# Altium PCB PCB1.PcbDoc
Units mil, origin at the board's own origin, x right, y up, seen from the top; angles counter-clockwise.
Board outline 1968.5 x 1968.5 mil, 2 copper layers (Top Layer, Bottom Layer), stack 65.792 mil thick; 11 components, 7 nets, 23 pads, 0 vias.
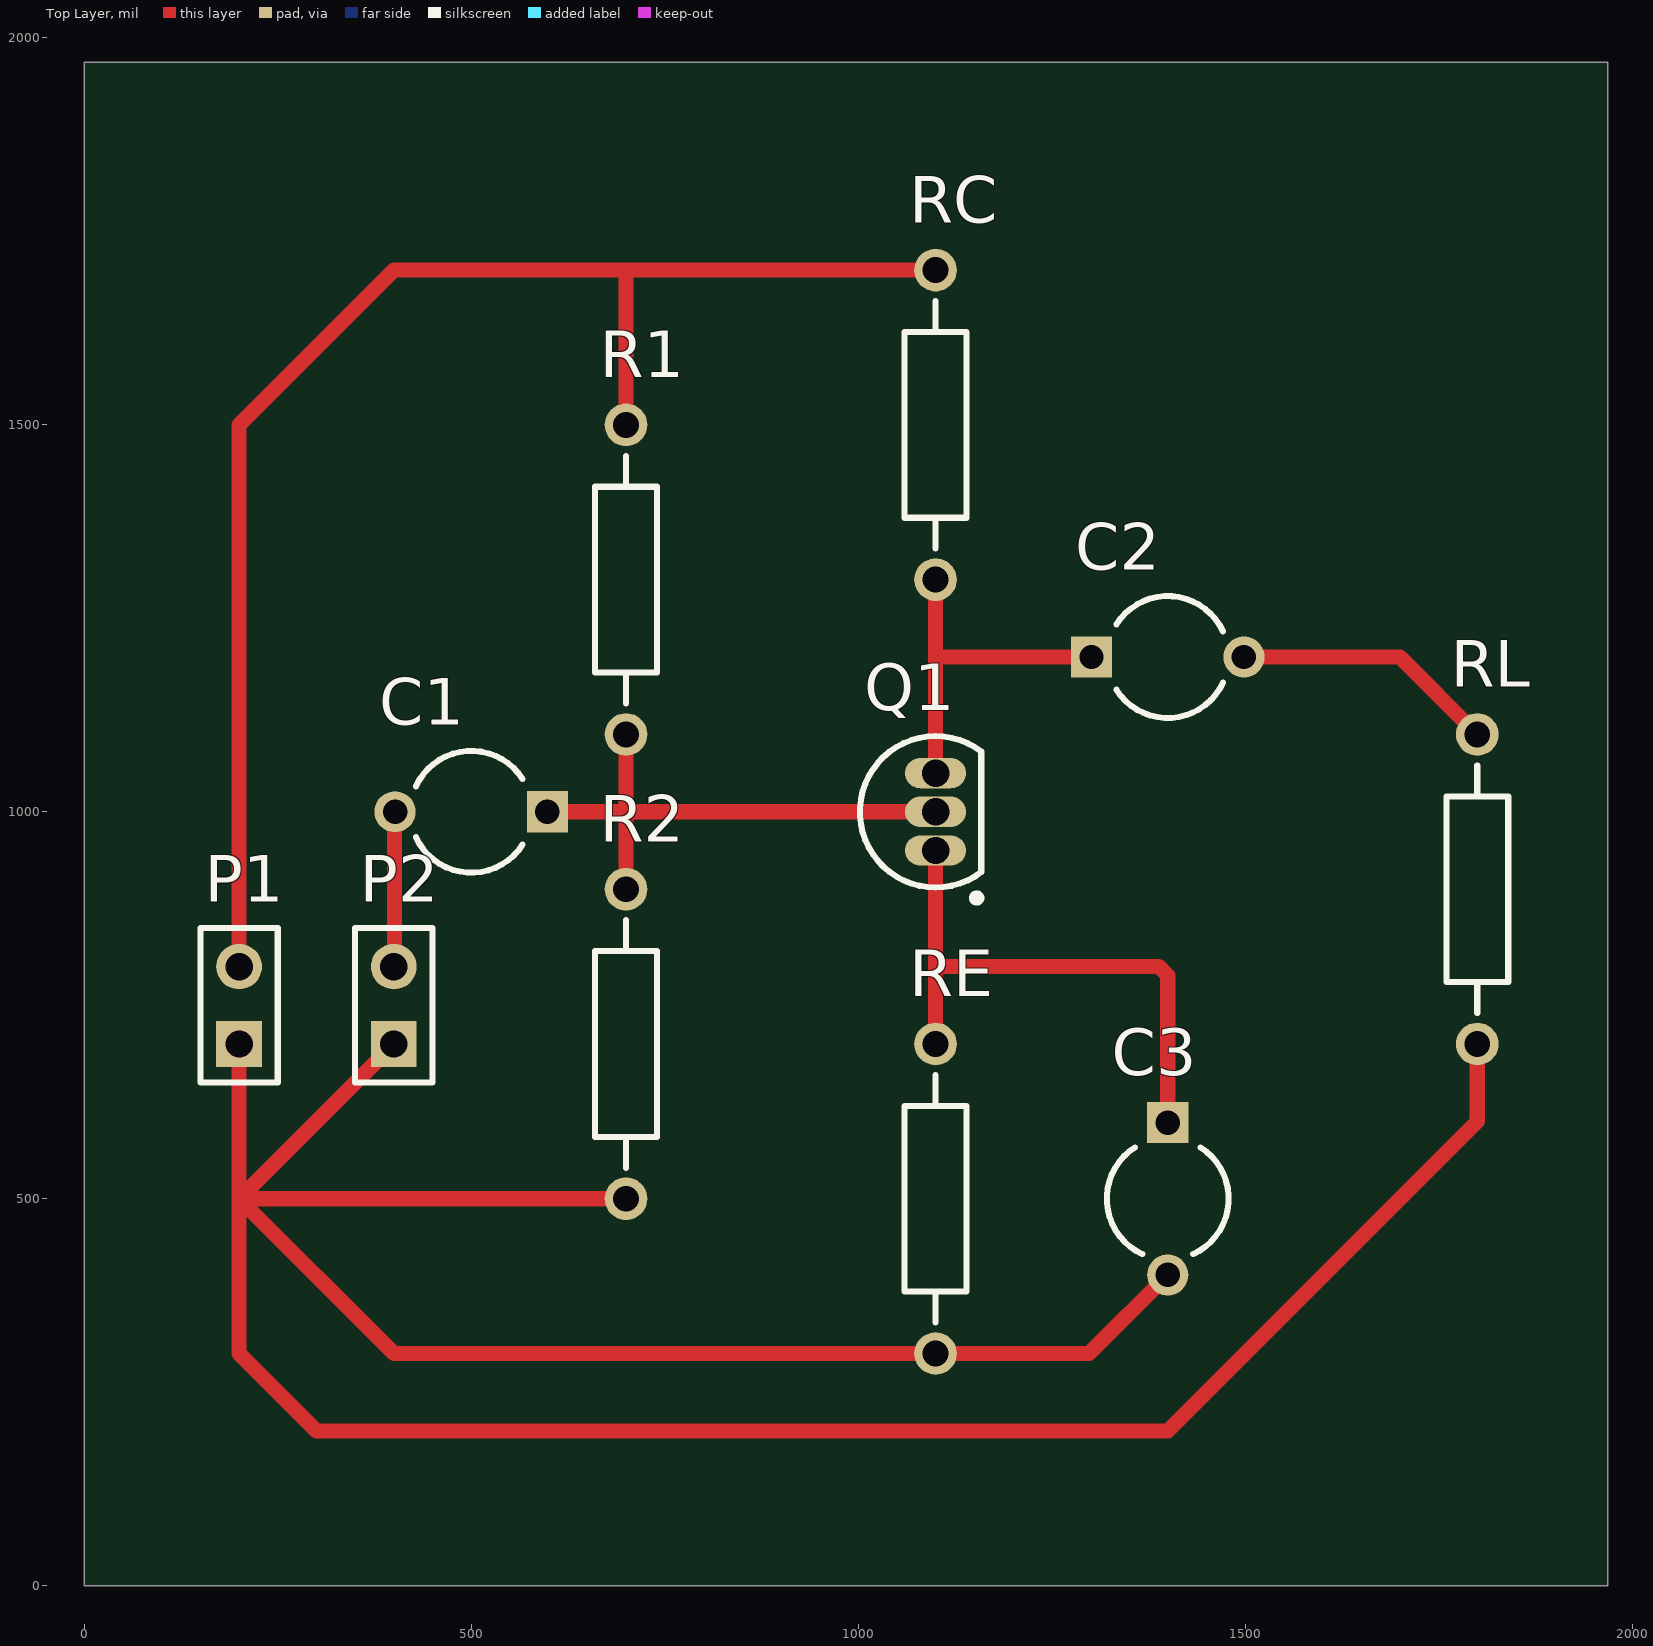
[diagram p0: Top Layer view]
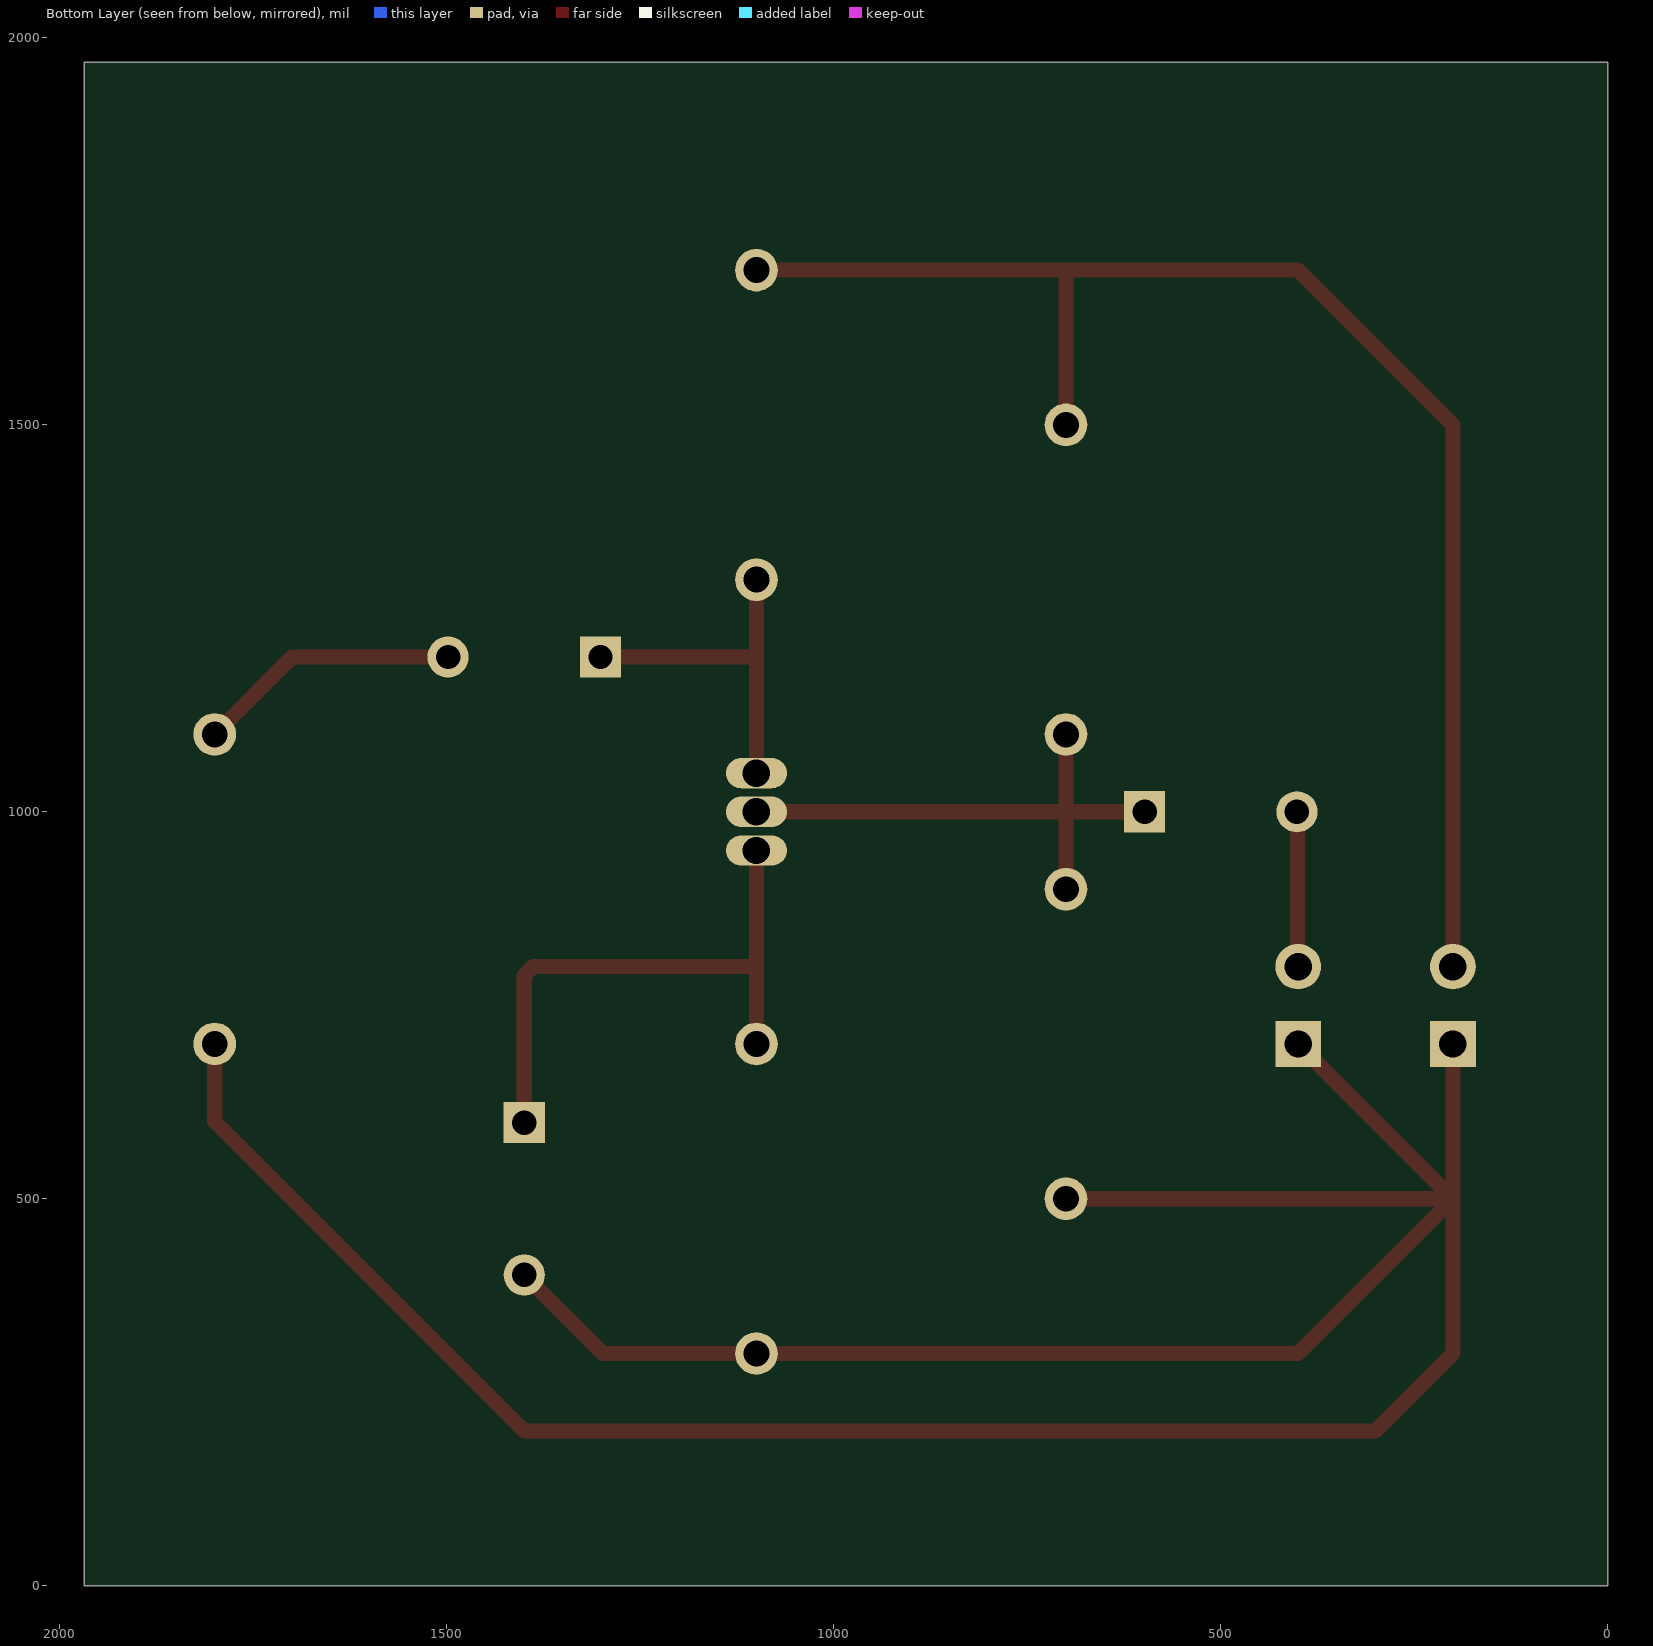
[diagram p1: Bottom Layer view, seen from below]

## Layer stack, top to bottom
Top Solder: solder mask 0.4, Solder Resist, Dk 3.5
Top Layer: signal copper 1.4
Dielectric 1: dielectric 62.9921, FR-4, Dk 4.8
Bottom Layer: signal copper 1.4
Bottom Solder: solder mask 0.4, Solder Resist, Dk 3.5

## Board outline
0,1968.5 1968.5,1968.5 1968.5,0 0,0

## Design rules (kind name [scope] priority, off if disabled: settings)
Clearance [All] p1: gap=0.3 ignorepadtopadclearanceinfootprint=FALSE
PolygonConnect [All] p1: connectstyle=Relief reliefconductorwidth=10 reliefentries=4 polygonreliefangle="90 Angle" airgapwidth=10
RoutingVias [All] p1: holewidth=28 width=50 viastyle="Through Hole" minholewidth=28 minwidth=50 maxholewidth=28 maxwidth=50
SolderMaskExpansion [All] p1: expansion=4 istentingtop=FALSE
Width [All] p1: maxlimit=39.37 minlimit=11.81 preferedwidth=19.68
30 further rules are at their usual default settings.

## Components (designator, comment, footprint, x,y, rotation, side; value= is the part's Value field where it differs from the comment)
C1 "Cap2" CAPR5-4X5 500,1000 r180 top value=100uF
C2 "Cap2" CAPR5-4X5 1400,1200 r0 top value=100uF
C3 "Cap2" CAPR5-4X5 1400,500 r270 top value=100uF
P1 "Power" HDR1X2 200,700 r90 top
P2 "Vsig" HDR1X2 400,700 r90 top
Q1 "2N3904" TO-92A 1100,1000 r0 top
R1 "" AXIAL-0.4 700,1300 r90 top value=1K
R2 "" AXIAL-0.4 700,700 r90 top value=1K
RC "" AXIAL-0.4 1100,1500 r90 top value=1K
RE "" AXIAL-0.4 1100,500 r90 top value=1K
RL "" AXIAL-0.4 1800,900 r90 top value=100K

## Footprints (in the part's own frame and the unit in brackets; to place one, negate y for a bottom-side part, rotate by r counter-clockwise, add the part's x,y. Pads: shape width x height; smd on the part's side, far side on the other; paste and mask are expansions set on the pad)
AXIAL-0.4 [mm] "Axial Device, Thru-Hole; 2 Leads; 0.4 in Pin Spacing"
  round 1.4 hole 0.85: 1(-5.08,0) 2(5.08,0)
  silkscreen extent -4.06,-1.02 4.06,1.02
CAPR5-4X5 [mm] "Capacitor; 2 Leads"
  rect 1.35x1.35 hole 0.8: 1(-2.5,0)
  round 1.35 hole 0.8: 2(2.5,0)
  silkscreen extent -1.69,-2 1.82,2
HDR1X2 [mm] "Connector; Header; 2 Position"
  rect 1.5x1.5 hole 0.9: 1(0,0)
  round 1.5 hole 0.9: 2(2.54,0)
  silkscreen extent -1.27,-1.27 3.81,1.27
TO-92A [mm] "TO, Flat Index; 3 In-Line, Axial Leads; Body Dia. 4.5mm; Leads 0.51 x 0.48 mm (max)"
  oval 2x1 hole 0.9: 1(0,-1.27) 2(0,0) 3(0,1.27)
  silkscreen extent -2.48,-2.95 1.5,2.48, body extent -2.48,-2.5 1.5,2.5, height 6.86

## Part data
C1 C2 C3: "Capacitor", PackageDescription="Capacitor; 2 Leads", PackageReference=CAPR5-4X5, Published=23-Sep-2002, Publisher="Altium Limited"
P1 P2: library part "Header 2", "Header, 2-Pin", LatestRevisionDate=17-Jul-2002, LatestRevisionNote="Re-released for DXP Platform.", Publisher="Altium Limited"
Q1: "NPN General Purpose Amplifier", ComponentLink1Description="Manufacturer Link", ComponentLink1URL=http://www.fairchildsemi.com/, ComponentLink2Description=Datasheet, ComponentLink2URL=http://www.fairchildsemi.com/ds/2N%2F2N3904.pdf, DatasheetVersion=1997, LatestRevisionDate=15-Jan-2003, LatestRevisionNote="PCB Footprint 'BCY-W3/D4.7' replaced", PackageDescription="TO, Flat Index; 3 In-Line, Axial Leads; Body Dia. 4.5mm; Leads 0.51 x 0.48 mm (max)", PackageReference=TO-92A, PackageVersion=Sep-1998, Published=8-Jun-2000, Publisher="Altium Limited"
R1 R2 RC RE RL: library part Res2, "Resistor", LatestRevisionDate=17-Jul-2002, LatestRevisionNote="Re-released for DXP Platform.", PackageDescription="Axial Device, Thru-Hole; 2 Leads; 0.4 in Pin Spacing", PackageReference=AXIAL-0.4, Published=8-Jun-2000, Publisher="Altium Limited"

## Nets (pads, with @x,y where several pads share a name; then routed paths per layer and width w, separated by ;. In a path a pad name is that pad's centre, name@x,y a point inside that pad or via, vN(x,y) a via of type N, cw(c..) or ccw(c..) an arc to the next point about the centre after c; other vN are vias at no path point)
GND: C3.2 P1.1 P2.1 R2.1 RE.1 RL.1 | length 4414.9
  Top Layer w19.68: P1.1 200,511.53 ; P2.1 211.53,511.53 200,511.53 ; R2.1 211.53,500 200,511.53 ; C3.2 1298.43,300 RE.1 400,300 200,500 ; RL.1 1800,600 1400,200 300,200 200,300 200,500 ; 200,500 200,511.53
Vb: C1.1 Q1.2 R1.1 R2.2 | length 701.6
  Top Layer w19.68: C1.1 700,1000 ; R2.2 700,1000 ; R1.1 700,1000 ; Q1.2 700,1000
Vc: C2.1 Q1.3 RC.1 | length 451.6
  Top Layer w19.68: Q1.3 1100,1200 ; RC.1 1100,1200 ; C2.1 1100,1200
VCC: P1.2 R1.2 RC.2 | length 1882.8
  Top Layer w19.68: P1.2 200,1500 400,1700 700,1700 ; R1.2 700,1700 ; RC.2 700,1700
Ve: C3.1 Q1.1 RE.2 | length 744.8
  Top Layer w19.68: RE.2 1100,800 ; Q1.1 1100,800 ; C3.1 1400,788.47 1388.47,800 1100,800
Vin: C1.2 P2.2 | length 202.9
  Top Layer w19.68: P2.2@399.21,800.79 P2.2 400.79,800.79 400.79,999.21 C1.2 C1.2@400.79,1000.79
Vout: C2.2 RL.2 | length 343
  Top Layer w19.68: C2.2 1700,1200 RL.2